# Altium PCB BEESC_v1.PcbDoc (part 3 of 4)
Units mm, origin at the board's own origin, x right, y up, seen from the top; angles counter-clockwise.
Board outline 50 x 44.5 mm, 6 copper layers (Top Layer, GND, SIG, SIG/PWR, GND2, Bottom Layer), stack 1.481 mm thick; 122 components, 109 nets, 495 pads, 357 vias.
Unrouted connection lines stored in the file: 71.
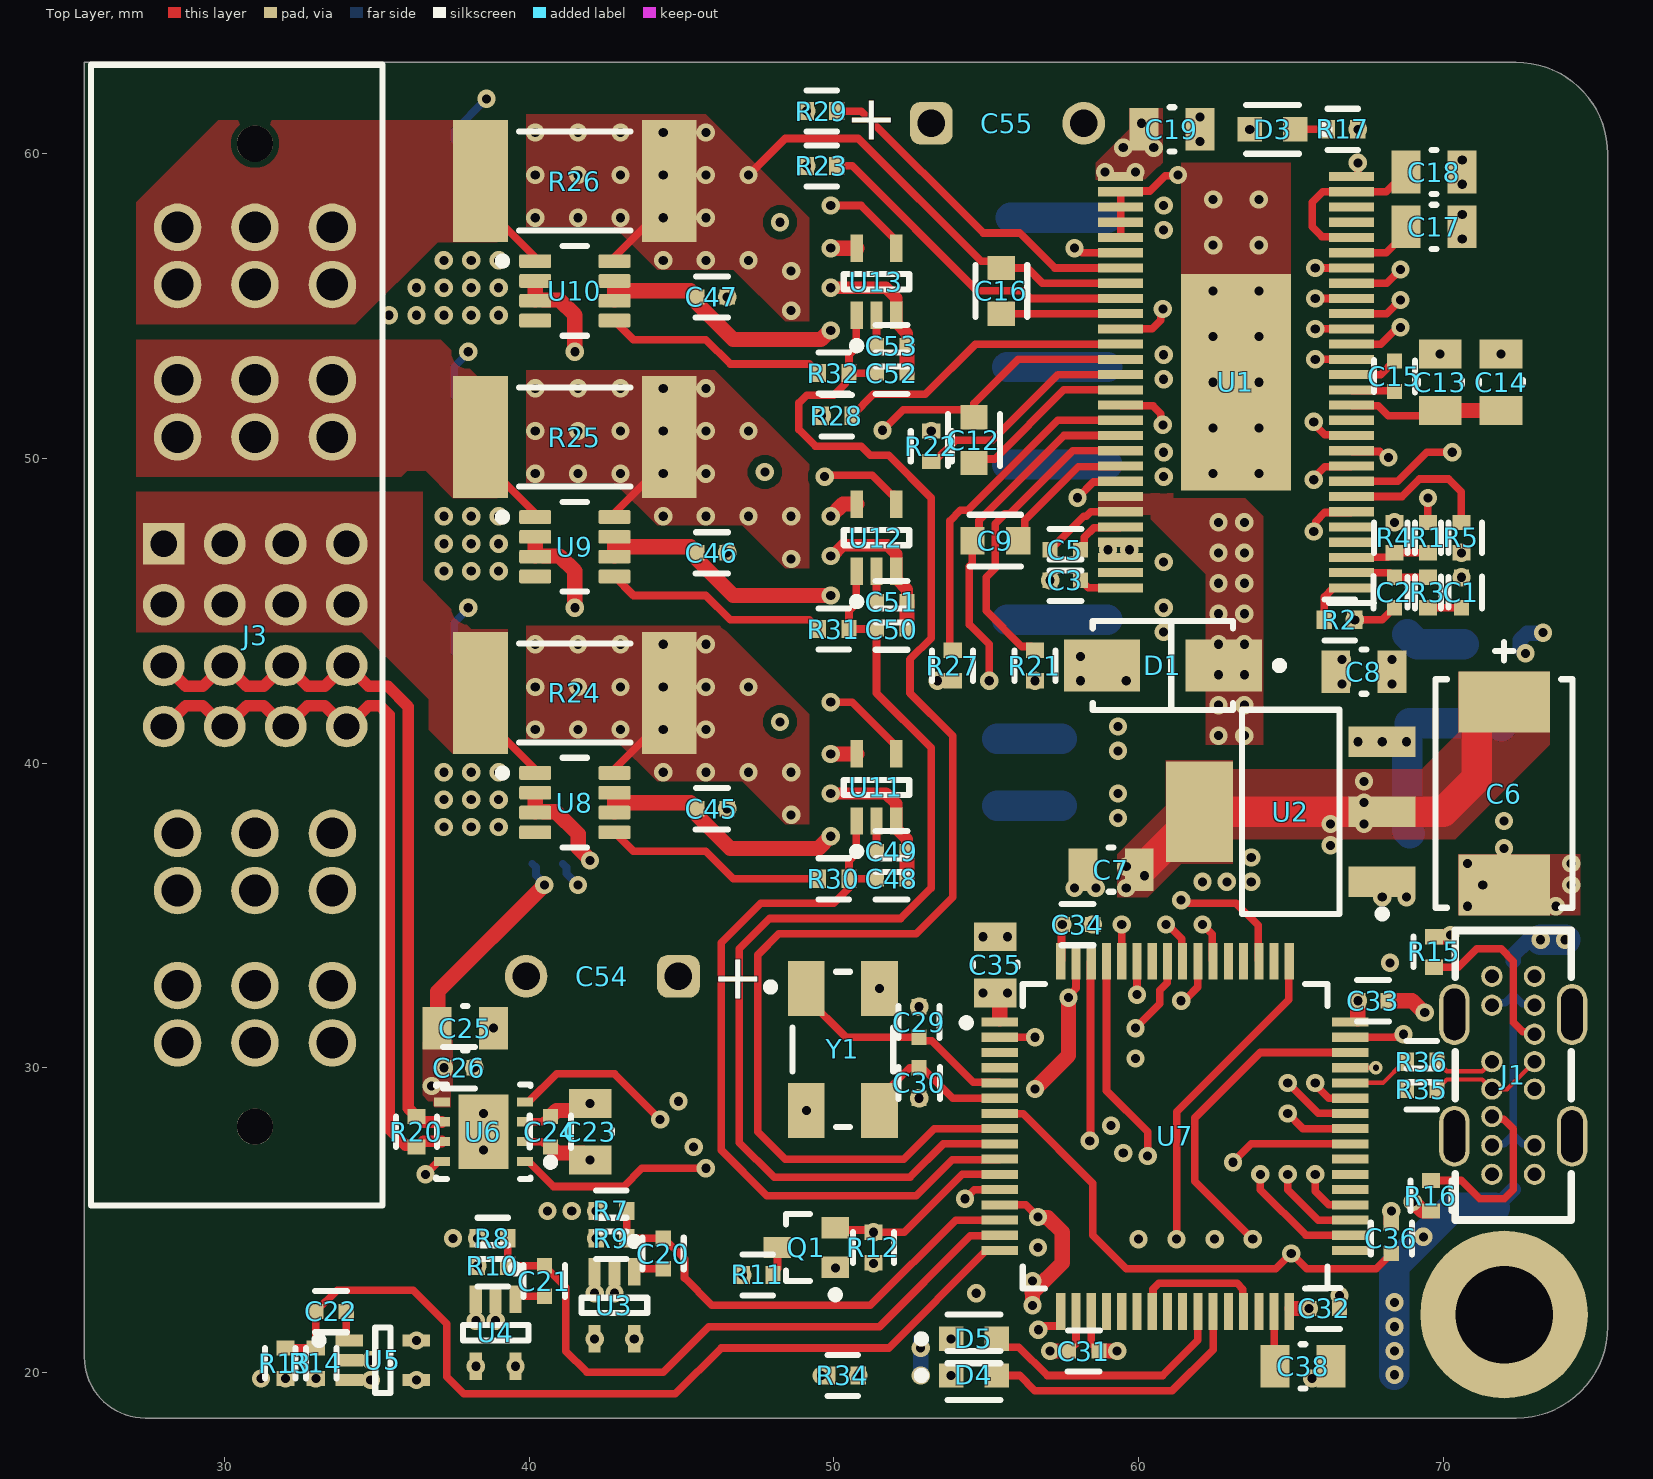
[diagram p0: Top Layer view]

## Part data (continued)
C48 C50 C52: library part 0402B102K500NT, "1nF 50V X7R ±10% 0402 Multilayer Ceramic Capacitors MLCC - SMD/SMT ROHS", Case Code (Imperial)=0402, Case Code (Metric)=1005, Dielectric=X7R, Dielectric Material=Ceramic, Manufacturer="Yageo Group", Manufacturer Part Number=CC0402KRX7R9BB682, Max Operating Temperature=125°C, Min Operating Temperature=-55°C, Supplier Part Number=311-1726-1-ND, Temperature Coefficient=30ppm/°C, Tolerance=10%, Voltage=50V, Case/Package=0402, Category="Ceramic Capacitors", China RoHS=Compliant, ComponentLink1Description=https://datasheet.octopart.com:443/CC0402KRX7R9BB682-Yageo-datasheet-177165144.pdf?src-supplier=IHS, ComponentLink1URL=https://datasheet.octopart.com:443/CC0402KRX7R9BB682-Yageo-datasheet-177165144.pdf?src-supplier=IHS, ComponentLink2Description=https://datasheet.octopart.com:443/CC0402KRX7R9BB682-Yageo-datasheet-78855684.pdf?src-supplier=Upverter, ComponentLink2URL=https://datasheet.octopart.com:443/CC0402KRX7R9BB682-Yageo-datasheet-78855684.pdf?src-supplier=Upverter, ComponentLink3Description=https://datasheet.octopart.com:443/CC0402KRX7R9BB682-Yageo-datasheet-147453679.pdf?src-supplier=Farnell, ComponentLink3URL=https://datasheet.octopart.com:443/CC0402KRX7R9BB682-Yageo-datasheet-147453679.pdf?src-supplier=Farnell, ComponentLink4Description=https://datasheet.octopart.com:443/CC0402KRX7R9BB682-Yageo-datasheet-182029474.pdf?src-supplier=Farnell, ComponentLink4URL=https://datasheet.octopart.com:443/CC0402KRX7R9BB682-Yageo-datasheet-182029474.pdf?src-supplier=Farnell, ComponentLink5Description=https://datasheet.octopart.com:443/CC0402KRX7R9BB682-Yageo-datasheet-140260305.pdf?src-supplier=element14+APAC, ComponentLink5URL=https://datasheet.octopart.com:443/CC0402KRX7R9BB682-Yageo-datasheet-140260305.pdf?src-supplier=element14+APAC, ComponentLink6Description=https://datasheet.octopart.com/CC0402KRX7R9BB682-Yageo-datasheet-10883670.pdf, ComponentLink6URL=https://datasheet.octopart.com/CC0402KRX7R9BB682-Yageo-datasheet-10883670.pdf, ComponentLink7Description=https://datasheet.octopart.com:443/CC0402KRX7R9BB682-Yageo-datasheet-166511530.pdf?src-supplier=Future+Electronics, ComponentLink7URL=https://datasheet.octopart.com:443/CC0402KRX7R9BB682-Yageo-datasheet-166511530.pdf?src-supplier=Future+Electronics, ComponentLink8Description=https://datasheet.octopart.com:443/CC0402KRX7R9BB682-Yageo-datasheet-137700082.pdf?src-supplier=Future+Electronics, ComponentLink8URL=https://datasheet.octopart.com:443/CC0402KRX7R9BB682-Yageo-datasheet-137700082.pdf?src-supplier=Future+Electronics, ComponentLink9Description=https://datasheet.octopart.com:443/CC0402KRX7R9BB682-Yageo-datasheet-137700084.pdf?src-supplier=Future+Electronics, ComponentLink9URL=https://datasheet.octopart.com:443/CC0402KRX7R9BB682-Yageo-datasheet-137700084.pdf?src-supplier=Future+Electronics, ComponentLink10Description=https://datasheet.octopart.com:443/CC0402KRX7R9BB682-Yageo-datasheet-27626582.pdf?src-supplier=Future+Electronics, ComponentLink10URL=https://datasheet.octopart.com:443/CC0402KRX7R9BB682-Yageo-datasheet-27626582.pdf?src-supplier=Future+Electronics, ComponentLink11Description=https://datasheet.octopart.com:443/CC0402KRX7R9BB682-Yageo-datasheet-24578986.pdf?src-supplier=Future+Electronics, ComponentLink11URL=https://datasheet.octopart.com:443/CC0402KRX7R9BB682-Yageo-datasheet-24578986.pdf?src-supplier=Future+Electronics, ComponentLink12Description=https://datasheet.octopart.com:443/CC0402KRX7R9BB682-Yageo-datasheet-15895757.pdf?src-supplier=Future+Electronics, ComponentLink12URL=https://datasheet.octopart.com:443/CC0402KRX7R9BB682-Yageo-datasheet-15895757.pdf?src-supplier=Future+Electronics, ComponentLink13Description=https://datasheet.octopart.com:443/CC0402KRX7R9BB682-Yageo-datasheet-12526321.pdf?src-supplier=Future+Electronics, ComponentLink13URL=https://datasheet.octopart.com:443/CC0402KRX7R9BB682-Yageo-datasheet-12526321.pdf?src-supplier=Future+Electronics, ComponentLink14Description=https://datasheet.octopart.com:443/CC0402KRX7R9BB682-Yageo-datasheet-178018872.pdf?src-supplier=Burklin+Elektronik, ComponentLink14URL=https://datasheet.octopart.com:443/CC0402KRX7R9BB682-Yageo-datasheet-178018872.pdf?src-supplier=Burklin+Elektronik, ComponentLink15Description=https://datasheet.octopart.com:443/CC0402KRX7R9BB682-Yageo-Group-datasheet-165992755.pdf?src-supplier=ODG+(Origin+Data+Global), ComponentLink15URL=https://datasheet.octopart.com:443/CC0402KRX7R9BB682-Yageo-Group-datasheet-165992755.pdf?src-supplier=ODG+(Origin+Data+Global), ComponentLink16Description=https://datasheet.octopart.com:443/CC0402KRX7R9BB682-Yageo-datasheet-120101875.pdf?src-supplier=Megastar, ComponentLink16URL=https://datasheet.octopart.com:443/CC0402KRX7R9BB682-Yageo-datasheet-120101875.pdf?src-supplier=Megastar, ComponentLink17Description=https://datasheet.octopart.com:443/CC0402KRX7R9BB682-Yageo-datasheet-62336348.pdf?src-supplier=Newark, ComponentLink17URL=https://datasheet.octopart.com:443/CC0402KRX7R9BB682-Yageo-datasheet-62336348.pdf?src-supplier=Newark, ComponentLink18Description=http://sigma.octopart.com:80/conflict_mineral_statement/Yageo-company-3.pdf?src-supplier=Compliance+Statements, ComponentLink18URL=http://sigma.octopart.com:80/conflict_mineral_statement/Yageo-company-3.pdf?src-supplier=Compliance+Statements, ComponentLink19Description=http://sigma.octopart.com:80/rohs_statement/Yageo-company-2.pdf?src-supplier=Compliance+Statements, ComponentLink19URL=http://sigma.octopart.com:80/rohs_statement/Yageo-company-2.pdf?src-supplier=Compliance+Statements, Composition=Ceramic, Depth=500µm, Halogen Free="Halogen Free", Height=500µm, Lead Free="Lead Free", Length=1mm, Lifecycle Status=Production, Material=Ceramic, Mounting Technology="Surface Mount", Number of Terminals=2, Packaging="Tape and Reel", Pins=2, Pricing="1=0.1, 10=0.024, 50=0.0156, 100=0.0133, 500=0.00934, 1000=0.00812, 2500=0.00685, 5000=0.00609 (USD)", Radiation Hardening=No, REACH SVHC=Yes, RoHS=Compliant, Schedule B="8532240020, 8532240020|8532240020|8532240020|8532240020|8532240020|8532240020|8532240020|8532240020|8532240020|8532240020|8532240020|8532240020|8532240020|8532240020|8532240020|8532240020|8532240020|8532240020|8532240020|8532240020|8532240020|8532240020|8532240020|85", Stock=93415, Supplier=DigiKey, Termination=SMD/SMT, Thickness=558.8µm, Voltage Rating=50V, Voltage Rating (DC)=50V, Weight=652.039032µg, Width=500µm
C54 C55: library part 860020678024, "Aluminium Electrolytic Capacitors - Radial Leaded WCAP-ATG5 680uF 50V 20% Radial"
D1: "-55℃~+125℃ 3A 40V 500uA@40V 550mV@3A Independent SMA(DO-214AC) Schottky Diodes ROHS", Manufacturer_Name=onsemi, Manufacturer_Part_Number=SS18, Mouser Part Number=512-SS18, Datasheet Link=https://www.onsemi.com/pub/Collateral/SS19-D.PDF, Geometry.Height=2.7mm, Mouser Price/Stock=https://www.mouser.co.uk/ProductDetail/onsemi-Fairchild/SS18?qs=mVVXn4M53U%252B25aMJheuSLA%3D%3D
D2: "-65℃~+150℃ 400W@10/1000us 43.5A 5V 7V 800uA 9.2V TVS Unidirectional DO-214AC(SMA) ESD and Surge Protection (TVS/ESD) ROHS", Manufacturer_Name=onsemi, Manufacturer_Part_Number=SS18, Mouser Part Number=512-SS18, Datasheet Link=https://www.onsemi.com/pub/Collateral/SS19-D.PDF, Geometry.Height=2.7mm, Mouser Price/Stock=https://www.mouser.co.uk/ProductDetail/onsemi-Fairchild/SS18?qs=mVVXn4M53U%252B25aMJheuSLA%3D%3D
D3: "-40℃~+85℃ 120° 2.4V 20mA 300mcd 40mW 615nm~630nm 645nm Red Water Clear 0603 LED Indication - Discrete ROHS"
D4: "100mW 120° 175mcd 3.1V 460nm~475nm 469nm 5mA Blue Water Clear 0603 LED Indication - Discrete ROHS"
D5: "-40℃~+85℃ 120° 20mA 2V~2.2V 30mcd~42mcd 40mW 567nm~573nm Discrete Diode Top-mount Water Clear Yellow Green 0603 LED Indication - Discrete ROHS"
J1: "-40℃~+85℃ 1 10,000 Cycles 14P 20V 5A Black Female Through Hole Type-C USB 3.1 Plugin USB Connectors ROHS"
J2: "Connector Header, GH Series, 5 Position, 1.25mm, Surface Mount, Right Angle, Tin, Natural"
J3: library part CMP-414-000000-2, "5mm (.1969 Inch) / 2mm (.0787 Inch) Pitch Power / Signal, Board to Board / Wire to Board Shrouded Box Header Connectors, Vertical or Right Angle, Locking Clip Option, PowerStrip™/30 Amps", Package=None, Availability=Unavailable, Component Type=Standard, Design Item ID=MPTC-02-16-02-01-XX-X-RA-LC, MF=Samtec, MP=MPTC-02-16-02-01-XX-X-RA-LC, Pin Count=40, Price=None, Source=MPTC-02-16-02-01-XX-X-RA-LC.SchLib, System=Connector
L1: library part NR8040-220M, "2.1A 2.4A 22uH 69mΩ Magnetic Shielded Inductor ±20% SMD,8x8mm Power Inductors ROHS"
Q1: "-55℃~+150℃ 2.4pF@30V 2V@250uA 32pF@30V 340mA 3Ω@4.5V 470mW 500pC@4.5V 60V SOT-323 MOSFETs ROHS"
Q2 Q3 Q4 Q5 Q6 Q7: "Insulated-Gate Field-Effect Transistor (IGFET), N-Channel, Enhancement, Body Diode, Pin 1 Source, 2 Source, 3 Source, 4 Source, 5 Gate, 6 Drain, 6 Pins", Manufacturer="Infineon Technologies", Manufacturer Order Number=IST006N04NM6, PackageReference=PG-HSOF-5-4
R1: library part 0402WGF3301TCE, "-55℃~+155℃ 3.3kΩ 50V 62.5mW Thick Film Resistor ±1% ±100ppm/℃ 0402 Chip Resistor - Surface Mount ROHS"
R2: library part 0402WGF2203TCE, "-55℃~+155℃ 220kΩ 50V 62.5mW Thick Film Resistor ±1% ±100ppm/℃ 0402 Chip Resistor - Surface Mount ROHS"
R3: library part 0402WGF1502TCE, "-55℃~+155℃ 15kΩ 50V 62.5mW Thick Film Resistor ±1% ±100ppm/℃ 0402 Chip Resistor - Surface Mount ROHS"
R4: library part 0402WGJ0183TCE, "-55℃~+155℃ 18kΩ 50V 62.5mW Thick Film Resistor ±100ppm/℃ ±5% 0402 Chip Resistor - Surface Mount ROHS"
R5 R6 R34: library part 0402WGF1002TCE, "-55℃~+155℃ 10kΩ 50V 62.5mW Thick Film Resistor ±1% ±100ppm/℃ 0402 Chip Resistor - Surface Mount ROHS"
R7 R8 R11 R13: library part 0402WGF3902TCE, "-55℃~+155℃ 39kΩ 50V 62.5mW Thick Film Resistor ±1% ±100ppm/℃ 0402 Chip Resistor - Surface Mount ROHS"
R9 R10 R12 R14: library part 0402WGF2201TCE, "-55℃~+155℃ 2.2kΩ 50V 62.5mW Thick Film Resistor ±1% ±100ppm/℃ 0402 Chip Resistor - Surface Mount ROHS"
R15 R16: library part 0402WGF5101TCE, "-55℃~+155℃ 5.1kΩ 50V 62.5mW Thick Film Resistor ±1% ±100ppm/℃ 0402 Chip Resistor - Surface Mount ROHS"
R17: library part 0402WGF4701TCE, "-55℃~+155℃ 4.7kΩ 50V 62.5mW Thick Film Resistor ±1% ±100ppm/℃ 0402 Chip Resistor - Surface Mount ROHS"
R18 R19: library part 0402WGF2200TCE, "-55℃~+155℃ 220Ω 50V 62.5mW Thick Film Resistor ±1% ±100ppm/℃ 0402 Chip Resistor - Surface Mount ROHS"
R20: library part 0402WGF1200TCE, "-55℃~+155℃ 120Ω 50V 62.5mW Thick Film Resistor ±1% ±100ppm/℃ 0402 Chip Resistor - Surface Mount ROHS"
R21 R22 R23 R27 R28 R29: library part 0402WGF470KTCE, "-55℃~+155℃ 4.7Ω 50V 62.5mW Thick Film Resistor ±1% ±200ppm/℃ 0402 Chip Resistor - Surface Mount ROHS"
R24 R25 R26: library part HoCGX2512-3W-1.5mR-1%, "1.5mΩ 3W Current Sense Resistor SMD ±1% ±25ppm/℃ 2512 Current Sense Resistors / Shunt Resistors ROHS"
R30 R31 R32: library part 0402WGF1001TCE, "-55℃~+155℃ 1kΩ 50V 62.5mW Thick Film Resistor ±1% ±100ppm/℃ 0402 Chip Resistor - Surface Mount ROHS"
R33: library part NCP15XH103F03RC, "-40℃~+125℃ 0.5mm 100mW 10kΩ 1mW/℃ 1mm 310uA 3380K 3434K 3455K ±1% ±1% 0402 NTC Thermistors ROHS"
R35 R36: library part 0402WGF220JTCE, "-55℃~+155℃ 22Ω 50V 62.5mW Thick Film Resistor ±1% ±100ppm/℃ 0402 Chip Resistor - Surface Mount ROHS"
U2: library part TC2117-3.3VDBTR, "-40℃~+125℃@(Tj) 1 3.3V 450mV@(800mA) 55dB@(1kHz) 6V 800mA 80uA Fixed Over Current Protection Positive SOT-223 Voltage Regulators - Linear, Low Drop Out (LDO) Regulators ROHS"
U3 U4 U5 U11 U12 U13: library part SN74LVC1G66DCKR, "-40℃~+85℃ 1 1.65V~5.5V 13pF 195MHz 1:1 4.2ns 5.5Ω 5ns 600ps SC-70-5 Analog Switches, Multiplexers ROHS"
U6: "-40℃~+150℃ 4.5V~5.5V 5Mbps 70mA CAN Transceiver HVSON-8-EP(3x3) CAN Transceivers ROHS"
U7: "-40℃~+85℃ 1.8V~3.6V 12bit 12bit 168MHz 192KB 1MB 32 Bit 51 ARM Cortex-M4 Built-in FLASH LQFP-64(10x10) Microcontrollers (MCU/MPU/SOC) ROHS"
U8 U9 U10: library part INA296A3IDDFR, "-30V~+30V -40℃~+125℃ -5V~110V 1 1.1MHz 100nV/℃ 166dB 2.5mA 2.7V~20V 20V 35uA 39nV/√Hz@1kHz 3uV 50V/V 8V/us SOT-23 Current Sense Amplifiers ROHS"
Y1: library part ABM3B-8.000MHZ-10-1-U-T, "-10℃~+60℃ 10pF 200Ω 8MHz ±10ppm ±10ppm SMD5032-4P Crystals ROHS"

## Free pads (board coordinates)
  round 5.5 hole 3.2: 2(72,21.9)

## Via types
v1: diameter 0.6, hole 0.3, Top Layer to Bottom Layer, tented both sides, 355 vias
v2: diameter 0.45, hole 0.2, Top Layer to Bottom Layer, tented both sides, 2 vias

## Nets (pads, with @x,y where several pads share a name; then routed paths per layer and width w, separated by ;. In a path a pad name is that pad's centre, name@x,y a point inside that pad or via, vN(x,y) a via of type N, cw(c..) or ccw(c..) an arc to the next point about the centre after c; other vN are vias at no path point)
+3.3: C6.2 C7.1 C25.1 C26.1 C27.1 C28.1 C31.1 C32.1 C33.1 C34.1 C35.1 C45.1 C46.1 C47.1 J2.5 R33.2 U1.49 U2.2 U2.4 U3.5 U4.5 U5.5 U6.5 U7.1 U7.13 U7.19 U7.32 U7.48 U7.64 U8.6 U8.7 U9.6 U9.7 U10.6 U10.7 U11.5 U12.5 U13.5 | length 195.3
  Top Layer w0.25: C35.1@55.3,32.45 C35.1@55.45,32.3 ; U7.13@55.45,25.5 56.3,25.5 v1(56.7,25.1) ; U7.64@57.45,33.5 57.475,33.525 57.475,34.675 v1(57.5,34.7) ; v1(58,48.708) 58.517,49.225 59.387,49.225 U1.49@59.412,49.25 ; U7.19@58.45,22 58.45,20.95 C31.1@58.7,20.7
  Top Layer w0.5: C25.1@36.975,31.3 37,31.325 37,32.5 v1(40.5,36) ; U8.6@42.8,38.4 42.8,38.7 ; U8.7@42.8,39 42.8,38.7 ; U9.6@42.8,46.8 42.8,47.1 ; U9.7@42.8,47.4 42.8,47.1 ; U10.6@42.8,55.2 42.8,55.5 ; U10.7@42.8,55.8 42.8,55.5 ; v1@49.881,54.181 49.854,54.181 49.573,53.9 46.7,53.9 45.5,55.1 C47.1@45.5,55.3 45.3,55.5 42.8,55.5 ; v1(49.9,37.6) 49.5,37.2 46.6,37.2 45.5,38.3 C45.1@45.5,38.5 45.3,38.7 42.8,38.7 ; v1(49.9,40.3) U11.5@50.75,40.3 ; v1(49.9,45.5) 46.7,45.5 45.5,46.7 C46.1@45.5,46.9 45.3,47.1 42.8,47.1 ; v1(49.9,48.1) 50.3,48.5 U12.5@50.75,48.5 ; v1(49.9,56.9) U13.5@50.75,56.9 ; U7.1@55.45,31.6 C35.1@55.45,32.3 ; 56.513,22.612 56.525,22.625 ; v1(56.525,22.2) 56.525,22.625 ; v1@56.544,23.019 v1(56.525,23) 56.525,22.625 ; v1(56.7,25.1) 56.719,25.081 57.019,25.081 57.5,24.6 57.5,23.6 56.525,22.625 ; C31.1@58.7,20.7 v1(59.3,20.7) ; U7.32@65.05,22.1 v1(65.6,22.1) ; U7.48@67.2,31.6 v1(67.2,32.2)
  Top Layer w1: C7.1@60.1,36.5 U2.4@62,38.4 U2.2@68,38.4 70,38.4 71.1,39.5 71.1,41.5 71.6,42 C6.2@72,42
  SIG w0.5: v1(36.3,21.05) v1@36.3,21.1
  SIG/PWR w0.5: v1(36.3,21.05) 36.327,21.05 36.427,20.95 38.8,20.95 v1(39.55,20.2) ; v1(43.45,21.1) 45.2,21.1 ; v1(54.9,32.45) v1(55.7,32.45) 55.719,32.431 56.369,32.431 59.7,29.1 61.2,29.1 61.8,29.7 ; v1(56.7,25.1) 57.9,25.1 58.625,24.375 v1(60,24.375) ; v1(57.5,34.7) 57.5,34.727 56.9,35.327 56.9,36.2 57.7,37 58.8,37 ; v1(59.3,20.7) 59.3,20.727 60,21.427 v1(60,24.375) ; v1(65.6,22.1) 62.275,22.1 v1(60,24.375) ; 66.1,34 67.2,32.9 v1(67.2,32.2)
  SIG/PWR w1: v1(36.3,21.05) 35.2,22.15 35.2,27.3 37,29.1 v1@37,30.1 ; v1(39.55,20.2) 39.85,19.9 44,19.9 45.2,21.1 51.1,21.1 53.8,23.8 55.3,23.8 56.1,23 v1(56.525,23) 58.625,23 v1(60,24.375) 60,25 61.8,26.8 61.8,29.7 66.1,34 66.1,38.4 ; v1(49.9,37.6) 50.9,37.6 52.25,38.95 ; v1(49.9,40.3) 50.9,40.3 51.5,39.7 ; v1(49.9,45.5) 50.9,45.5 51.5,46.1 ; v1(49.9,48.1) 50.9,48.1 52.2,46.8 54.109,48.708 ; v1(49.9,54.2) 50.4,54.2 51.75,55.55 ; v1(49.9,56.9) 50.4,56.9 51.7,55.6 52.8,55.6 55.3,53.1 55.3,49.9 54.109,48.708 ; 52.2,46.8 51.5,46.1 ; v1(58,48.708) 54.109,48.708 ; v1(60.2,36.3) 59.5,37 58.8,37 56.85,38.95 52.25,38.95 ; 51.5,39.7 52.25,38.95 ; 51.5,39.7 51.5,46.1
  Bottom Layer w0.25: R33.2@40.1,36.7 40.225,36.575 40.225,36.321 40.5,36.046 v1(40.5,36)
  other v1: 36.8,29.4 37.2,30 59.6,35.9 59.6,36.6 66.3,37.3 66.3,38 67.4,38 67.4,38.7 67.4,39.4